# Altium PCB PCB1.PcbDoc (part 1 of 2)
Units mm, origin at the board's own origin, x right, y up, seen from the top; angles counter-clockwise.
Board outline 74.3 x 80 mm, 4 copper layers (Top Layer, GND_PLANE, PWR_PLANE, Bottom Layer), stack 0.603 mm thick; 83 components, 65 nets, 320 pads, 166 vias.
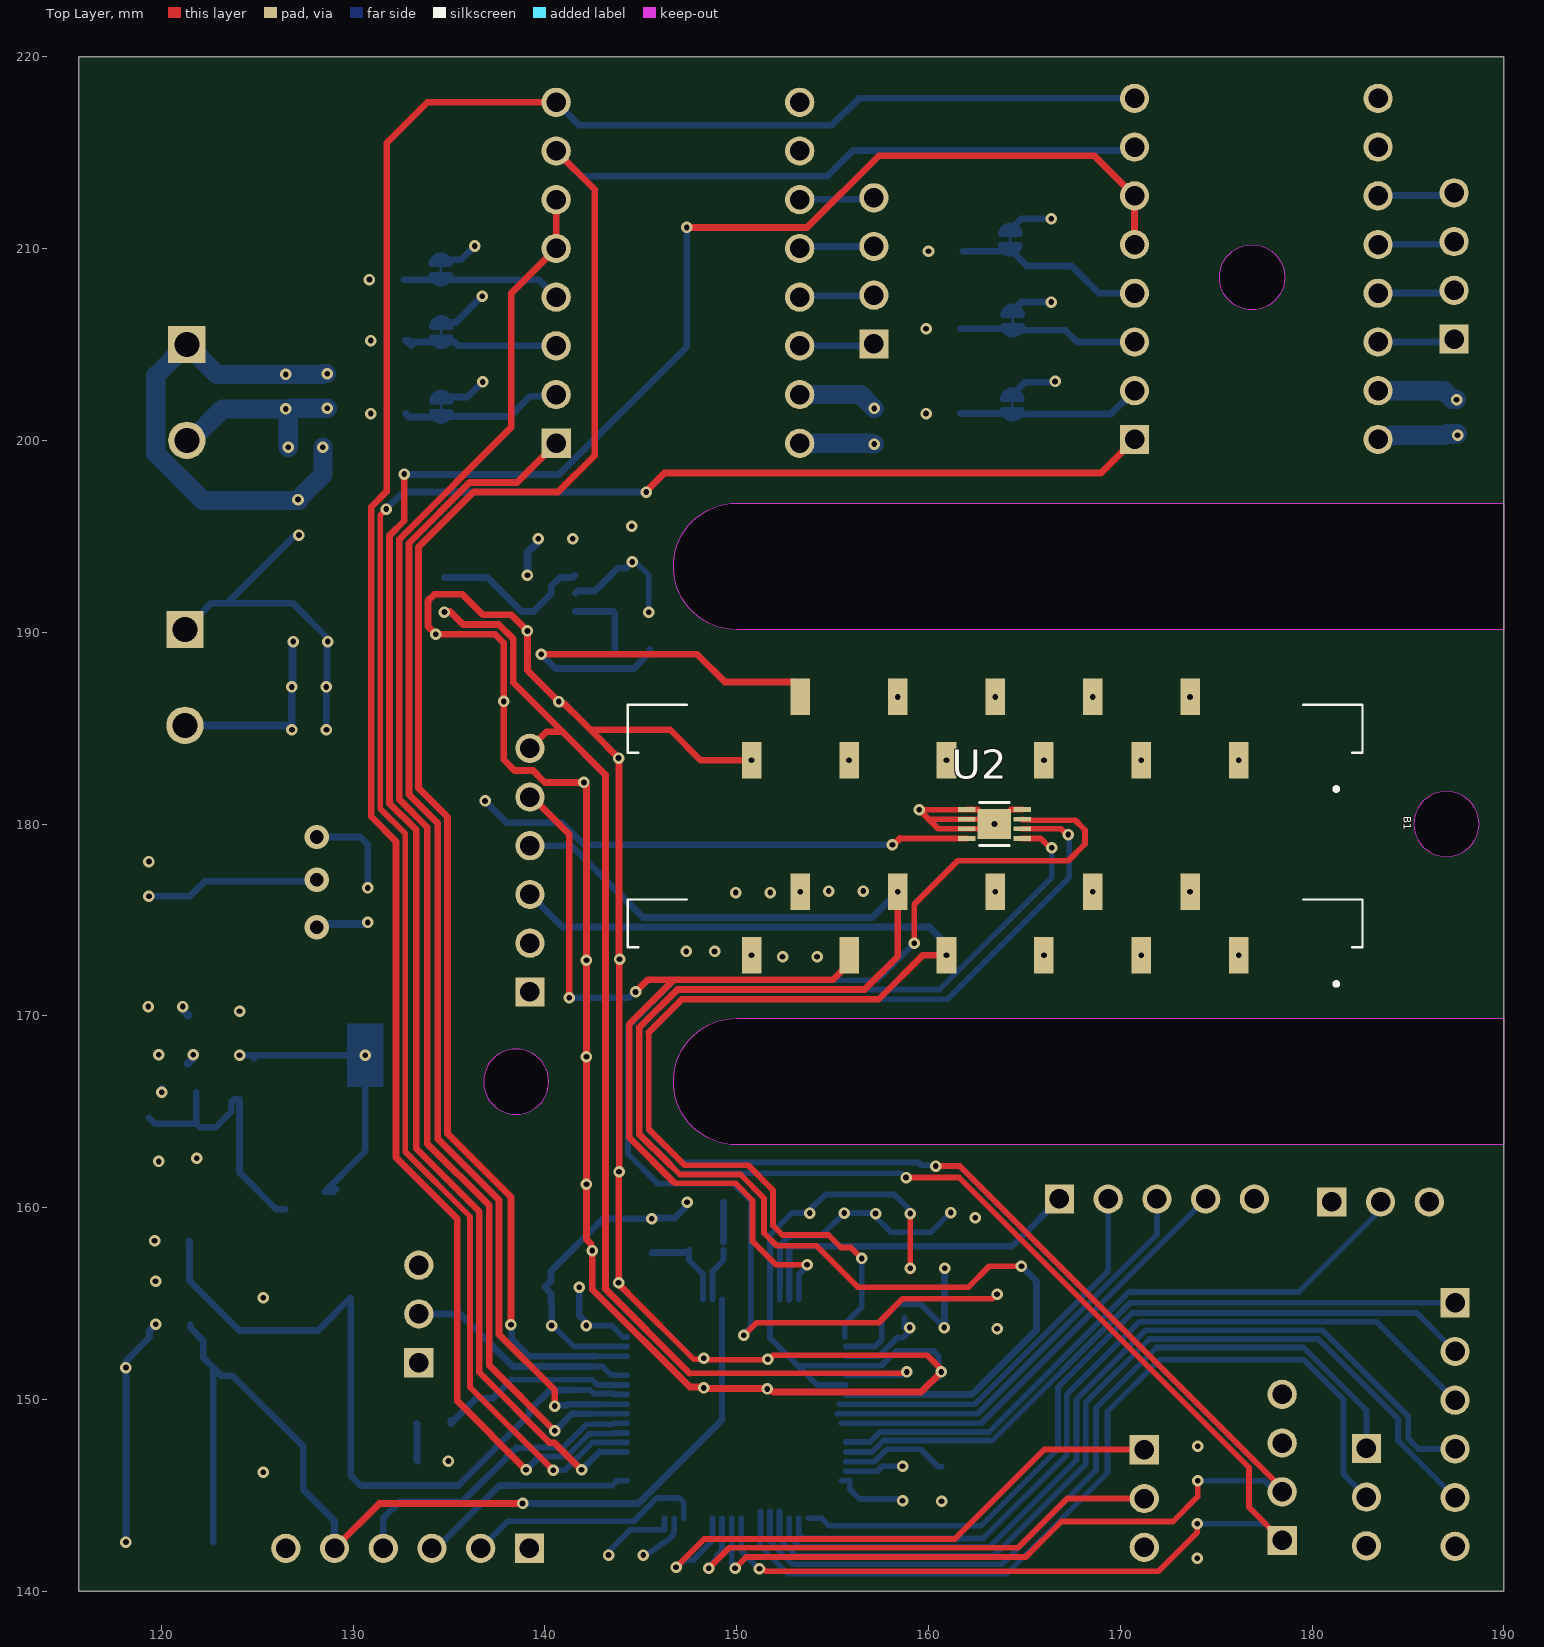
[diagram p0: Top Layer view]
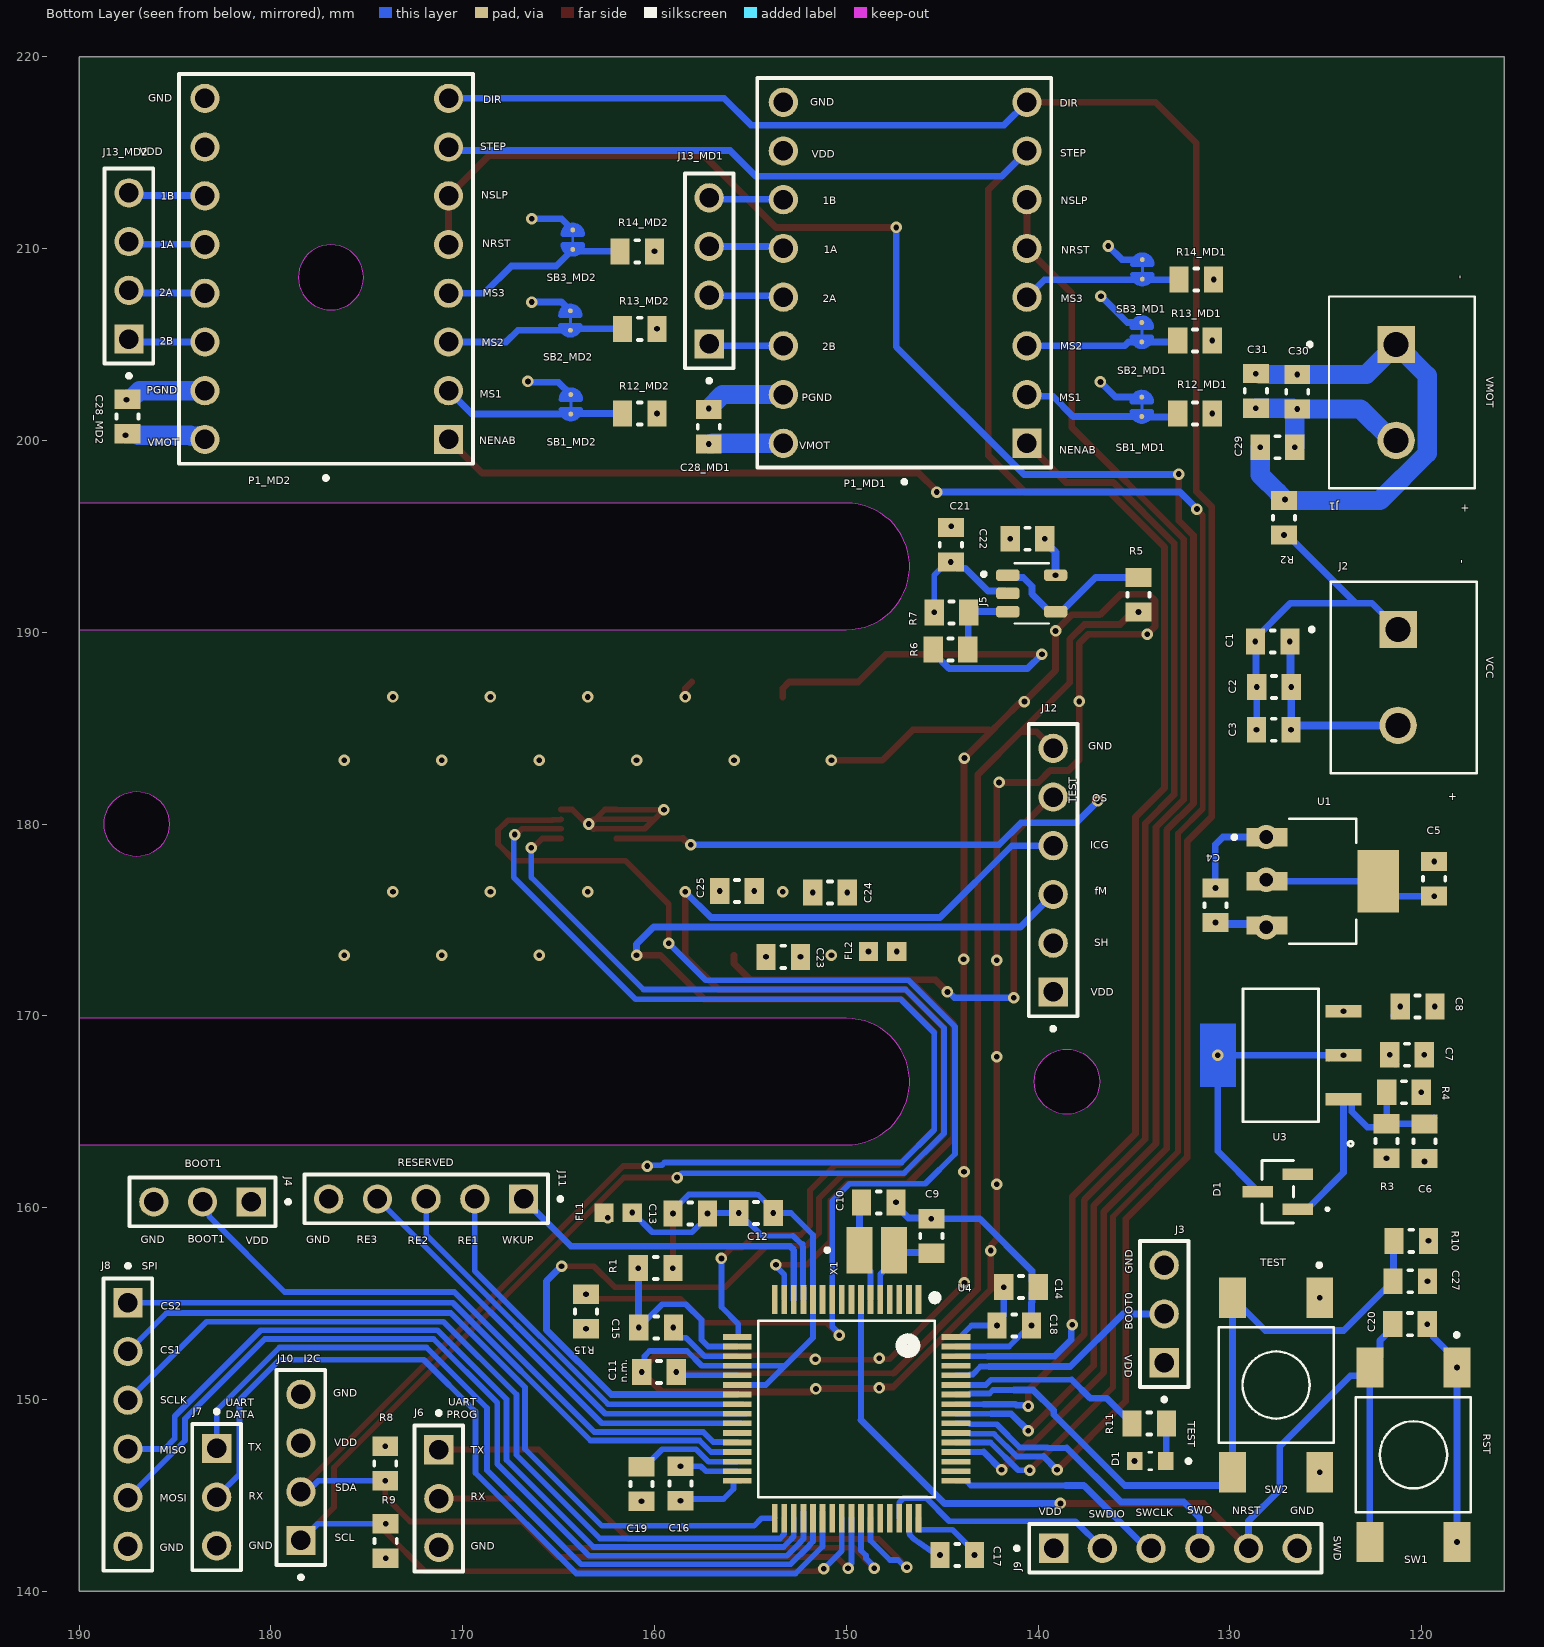
[diagram p1: Bottom Layer view, seen from below]
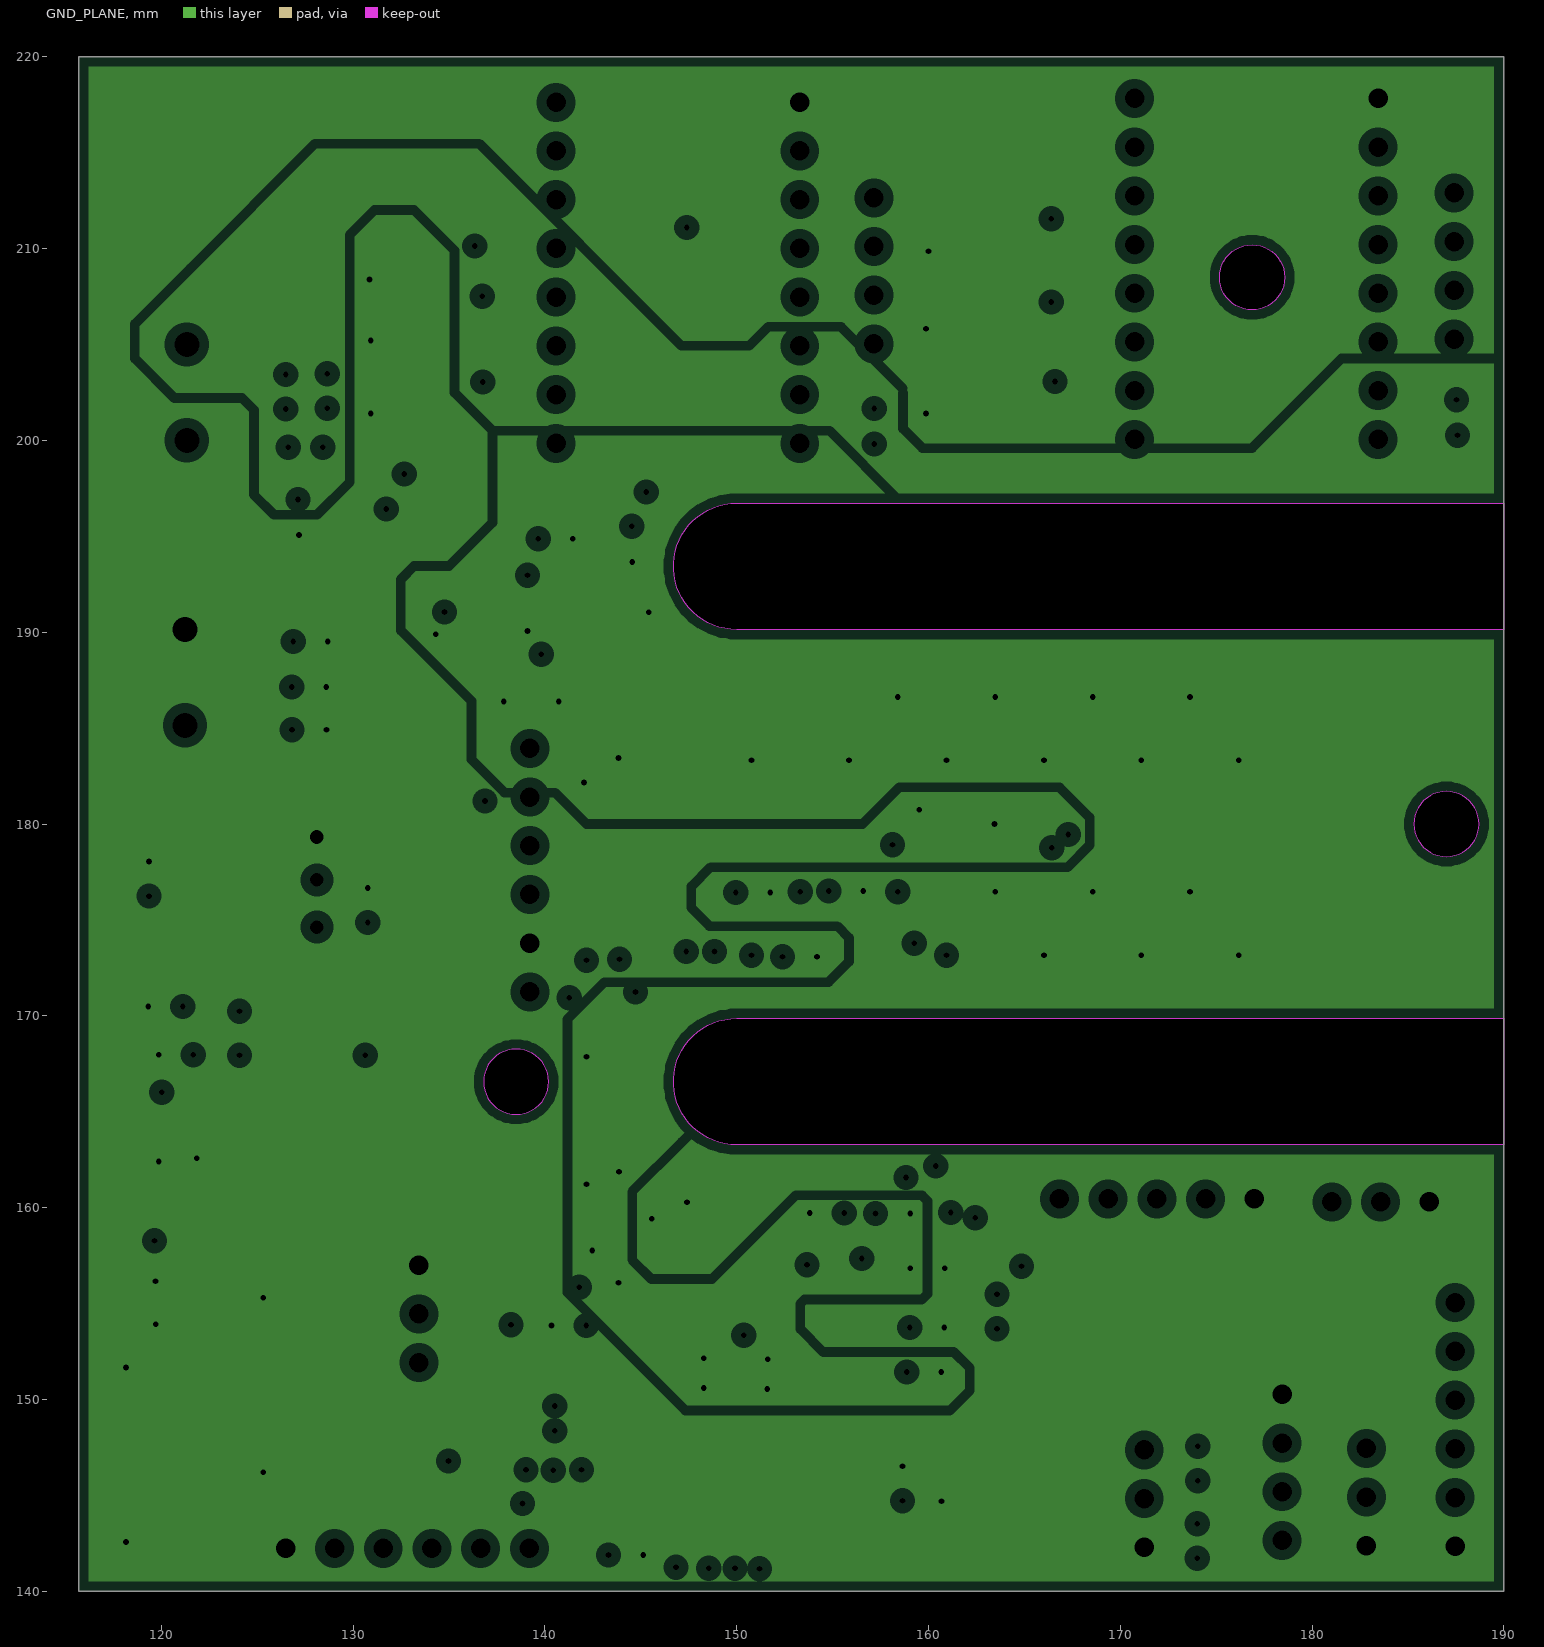
[diagram p2: GND_PLANE, clearances drawn from the general rule]
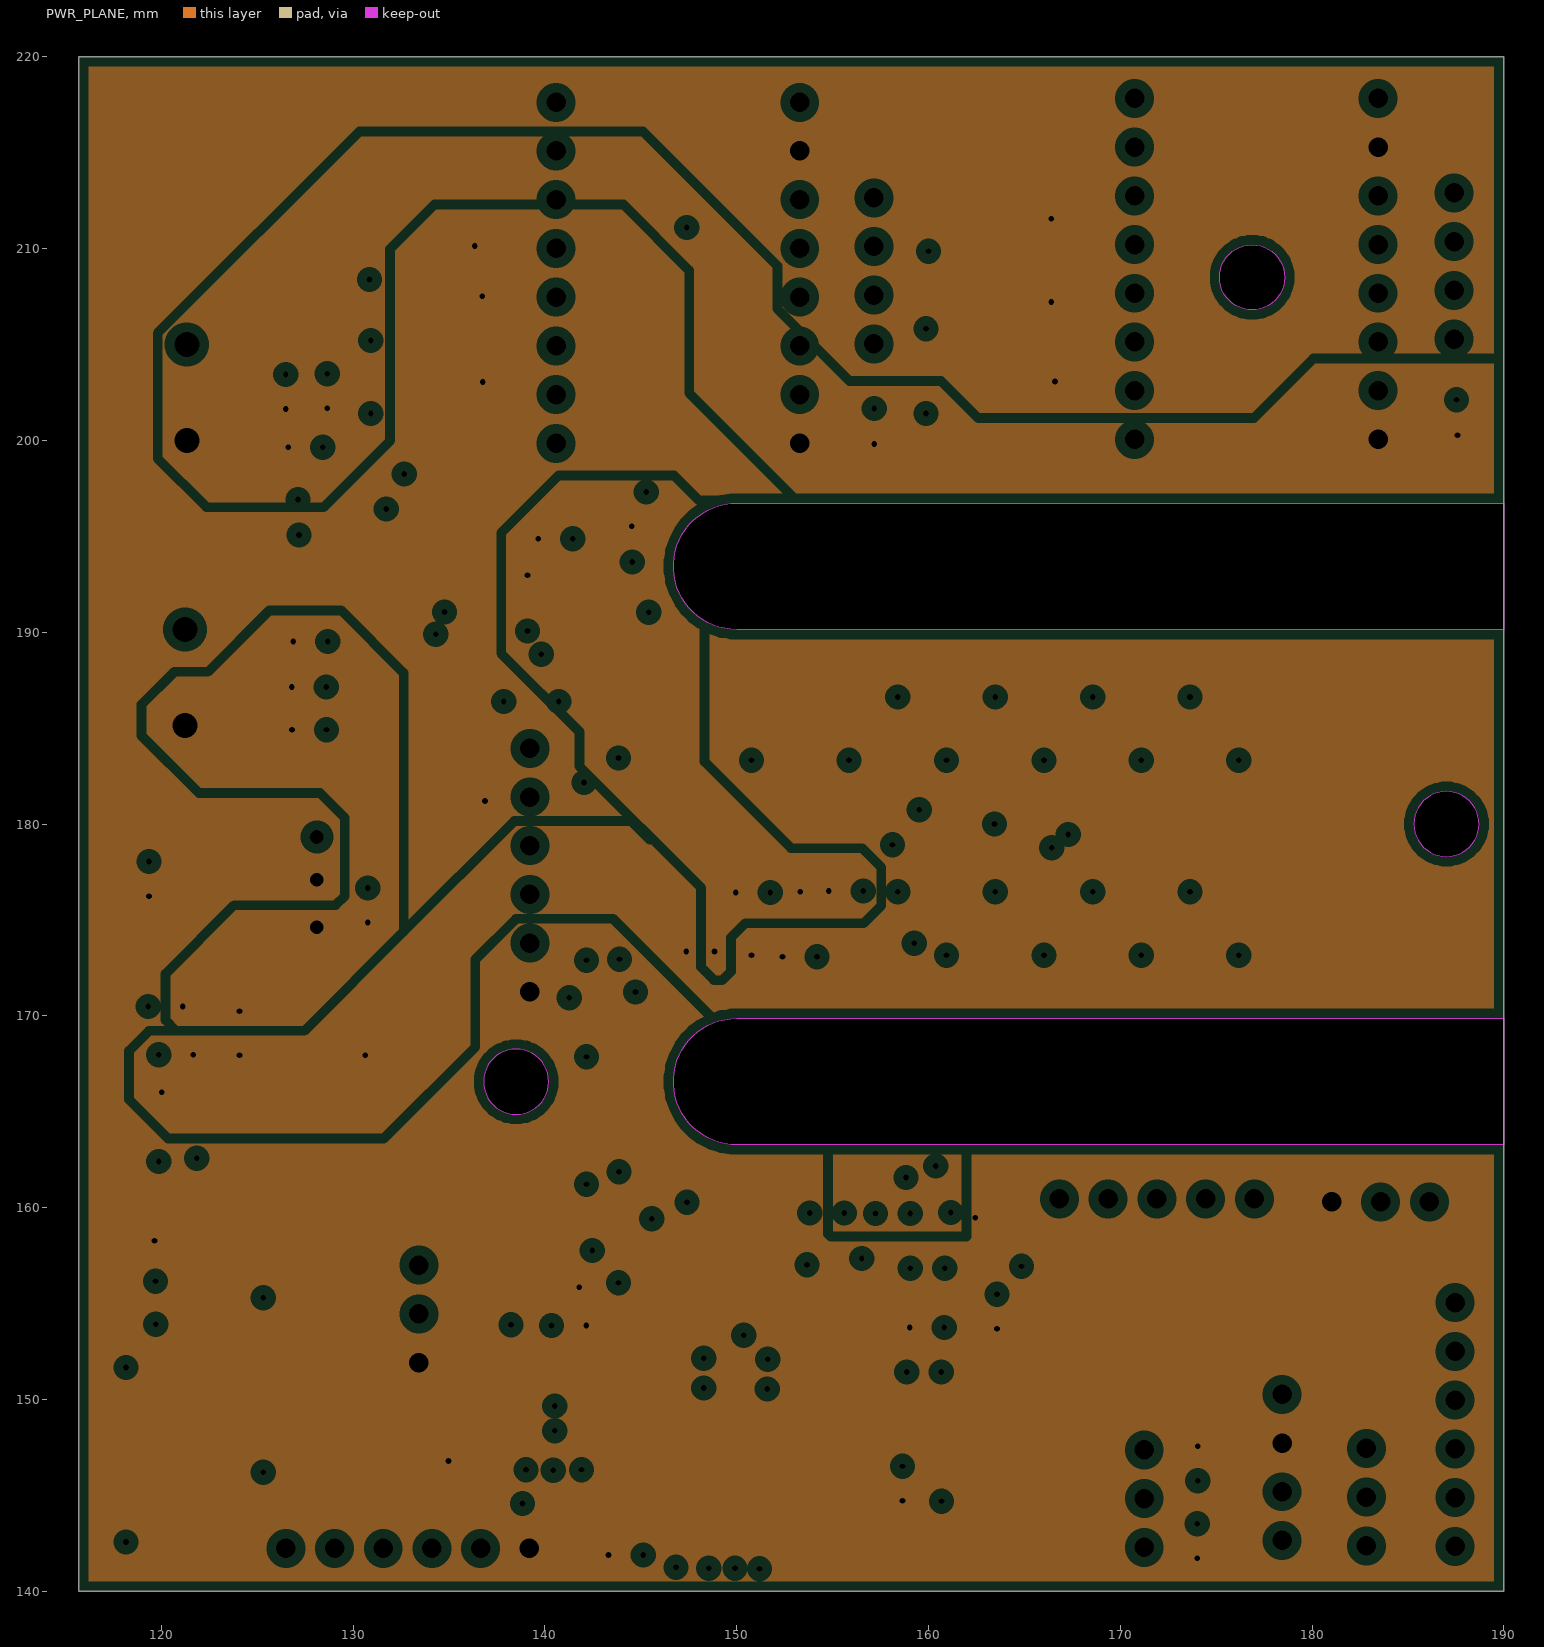
[diagram p3: PWR_PLANE, clearances drawn from the general rule]

## Layer stack, top to bottom
Top Solder: solder mask 0.0102, Solder Resist, Dk 3.5
Top Layer: signal copper 0.0356
Dielectric 2: prepreg 0.0711, PP-006, Dk 4.1
GND_PLANE: plane copper 0.035, net GND
Dielectric 1: dielectric 0.32, FR-4, Dk 4.8
PWR_PLANE: plane copper 0.035, net (Multiple Nets)
Dielectric 3: prepreg 0.0711, PP-006, Dk 4.1
Bottom Layer: signal copper 0.0356
Bottom Solder: solder mask 0.0102, Solder Resist, Dk 3.5

## Board outline
115.697,140 115.697,220 190,220 190,140
cut-out: 150,163.265 cw(c150,166.565) 150,169.865 190,169.865 190,163.265
cut-out: 150,190.135 cw(c150,193.435) 150,196.735 190,196.735 190,190.135
cut-out: 176.87,206.8 cw(c176.87,208.5) 175.17,208.5 cw(c176.87,208.5) 176.87,210.2 cw(c176.87,208.5) 178.57,208.5 cw(c176.87,208.5)
cut-out: 185.3,180 ccw(c187,180) 187,178.3 ccw(c187,180) 188.7,180 ccw(c187,180) 187,181.7 ccw(c187,180)
cut-out: 138.5,164.865 ccw(c138.5,166.565) 140.2,166.565 ccw(c138.5,166.565) 138.5,168.265 ccw(c138.5,166.565) 136.8,166.565 ccw(c138.5,166.565)

## Design rules (kind name [scope] priority, off if disabled: settings)
BoardOutlineClearance [All] p1: gap=0.5 ignorepadtopadclearanceinfootprint=FALSE
Clearance Clearance_bridges [All vs InComponent('SB4_MD1') OR InComponent('SB5_MD1') OR InComponent('SB6_MD1') OR InComponent('SB4_MD2') OR InComponent('SB5_MD2') OR InComponent('SB6_MD2')] p1: gap=0.05 ignorepadtopadclearanceinfootprint=FALSE
Clearance [All] p2: gap=0.15 ignorepadtopadclearanceinfootprint=FALSE
PlaneClearance [All] p1: clearance=0.508
PlaneConnect [All] p1: planeconnectstyle=Relief reliefexpansion=0.508 reliefentries=4 reliefconductorwidth=0.254 reliefairgap=0.254
PolygonConnect [All] p1: connectstyle=Relief reliefconductorwidth=0.254 reliefentries=4 polygonreliefangle="90 Angle" airgapwidth=0.254
RoutingVias [All] p1: holewidth=0.6 width=1 viastyle="Through Hole" minholewidth=0.3 minwidth=0.5 maxholewidth=0.3 maxwidth=0.6
ShortCircuit ShortCircuit_bridges [All vs InComponent('SB4_MD1') OR InComponent('SB5_MD1') OR InComponent('SB6_MD1') OR InComponent('SB4_MD2') OR InComponent('SB5_MD2') OR InComponent('SB6_MD2')] p1: allowed=TRUE
ShortCircuit [All] p2: allowed=FALSE
SolderMaskExpansion [All] p1: expansion=0.102 istentingtop=FALSE
SupplyNets "Schematic Supply Nets_3" [InNet('VBB')] p1: voltage=0.000
SupplyNets "Schematic Supply Nets_8" [InNet('VTCDA')] p2: voltage=0.000
SupplyNets "Schematic Supply Nets_7" [InNet('VDD')] p3: voltage=0.000
SupplyNets "Schematic Supply Nets_6" [InNet('PGND')] p4: voltage=0.000
SupplyNets "Schematic Supply Nets_5" [InNet('AGND')] p5: voltage=0.000
SupplyNets "Schematic Supply Nets_4" [InNet('GND')] p6: voltage=0.000
SupplyNets "Schematic Supply Nets_2" [InNet('VDDA')] p7: voltage=0.000
SupplyNets "Schematic Supply Nets_1" [InNet('VCC')] p8: voltage=0.000
SupplyNets "Schematic Supply Nets" [InNet('VTCD')] p9: voltage=0.000
Width Width_bridges [InComponent('SB4_MD1') OR InComponent('SB5_MD1') OR InComponent('SB6_MD1') OR InComponent('SB4_MD2') OR InComponent('SB5_MD2') OR InComponent('SB6_MD2')] p1: maxlimit=0.254 minlimit=0.15 preferedwidth=0.2
Width Width_motores [InNet('VBB')] p2: maxlimit=2 minlimit=0.5 preferedwidth=1
Width [All] p3: maxlimit=1 minlimit=0.2 preferedwidth=0.25
27 further rules are at their usual default settings.

## Classes and differential pairs
channel class MotorDriver: MD1 MD2
component class U_Sensor: B1 C21 C22 C23 C24 C25 FL2 J5 R5 R6 R7 R15 U2
component class U_Power: C1 C2 C3 C4 C5 C6 C7 C8 C29 C30 C31 D1 J1 J2 R1 R2 R3 R4 U1 U3
component class U_Out: C27 D1 J6 J7 J8 J9 J10 J11 J12 R8 R9 R10 R11 SW2
component class U_Microcontroller: C9 C10 C11 C12 C13 C14 C15 C16 C17 C18 C19 C20 FL1 J3 J4 SW1 U4 X1
component class MD2: C28_MD2 J13_MD2 P1_MD2 R12_MD2 R13_MD2 R14_MD2 SB1_MD2 SB2_MD2 SB3_MD2
component class MD1: C28_MD1 J13_MD1 P1_MD1 R12_MD1 R13_MD1 R14_MD1 SB1_MD1 SB2_MD1 SB3_MD1

## Components (designator, comment, footprint, x,y, rotation, side; value= is the part's Value field where it differs from the comment)
B1 "TCD1304DG_8Z_AW_" SOCKET-15_SMD-HARWIN_M20-7861546 163.435,180 r0 top locked
C1 "4.7uF" RES_0805 127.776,189.509 r180 bottom
C2 "100nF" RES_0805 127.7,187.147 r180 bottom
C3 "100pF" RES_0805 127.711,184.912 r180 bottom
C4 "10uF" RES_0805 130.759,175.768 r270 bottom
C5 "10uF" RES_0805 119.355,177.14 r270 bottom
C6 "22uF" RES_0805 119.863,163.46 r90 bottom
C7 "10uF" RES_0805 120.766,167.97 r0 bottom
C8 "10uF" RES_0805 120.218,170.485 r0 bottom
C9 "10pF" RES_0805 145.567,158.521 r270 bottom
C10 "10pF" RES_0805 148.311,160.274 r0 bottom
C11 "100pF not mount" RES_0805 159.766,151.435 r180 bottom
C12 "4.7uF" RES_0805 154.711,159.715 r180 bottom
C13 "100nF" RES_0805 158.14,159.69 r0 bottom
C14 "4.7uF" RES_0805 140.894,155.854 r180 bottom
C15 "100nF" RES_0805 159.918,153.746 r0 bottom
C16 "100nF" RES_0805 158.648,145.618 r90 bottom
C17 "100nF" RES_0805 144.221,141.884 r0 bottom
C18 "100nF" RES_0805 141.249,153.848 r180 bottom
C19 "4.7uF" RES_0805 160.68,145.593 r90 bottom
C20 "100nF" RES_0805 120.61,153.924 r180 bottom
C21 "10uF" RES_0805 144.551,194.564 r270 bottom
C22 "100nF" RES_0805 140.553,194.869 r0 bottom
C23 "10uF" RES_0805 153.289,173.076 r0 bottom
C24 "10uF" RES_0805 150.851,176.428 r0 bottom
C25 "100nF" RES_0805 155.702,176.505 r0 bottom
C27 "100nF" RES_0805 120.599,156.159 r180 bottom
C28_MD1 "100uF" RES_0805 157.175,200.711 r90 bottom (schematic designator C28)
C28_MD2 "100uF" RES_0805 187.477,201.244 r90 bottom (schematic designator C28)
C29 "4.7uF" RES_0805 127.522,199.644 r180 bottom
C30 "100nF" RES_0805 126.492,202.54 r270 bottom
C31 "100pF" RES_0805 128.651,202.579 r270 bottom
D1 "BAS40-7-F" SOT-23_DIO-M 127.508,160.832 r90 bottom
D1 "LED" LEDC1608X35N 134.163,146.787 r0 bottom
FL1 "BEAD" BEADC1608X95N 161.898,159.741 r180 bottom
FL2 "BEAD" BEADC1608X95N 148.107,173.355 r0 bottom
J1 "2PBORN" CUI_TB002-500-02BE 121.336,205 r270 bottom
J2 "Bornera" CUI_TB002-500-02BE 121.234,190.141 r270 bottom
J3 "PIN_HEADER_3" GEN_PIN3 133.426,154.457 r90 bottom
J4 "PIN_HEADER_3" GEN_PIN3 183.566,160.299 r0 bottom
J5 "OPAMP" SOT95P280X145-5N 140.335,192.024 r180 bottom
J6 "PIN_HEADER_3" GEN_PIN3 171.247,144.831 r270 bottom
J7 "PIN_HEADER_3" GEN_PIN3 182.829,144.907 r270 bottom
J8 "PIN_HEADER_6" GEN_PIN6 187.452,148.692 r270 bottom
J9 "PIN_HEADER_6" GEN_PIN6 132.842,142.24 r180 bottom
J10 "PIN_HEADER_4" GEN_PIN4 178.435,146.456 r90 bottom
J11 "PIN_HEADER_5" GEN_PIN5 171.907,160.452 r0 bottom
J12 "PIN_HEADER_6" GEN_PIN6 139.217,177.597 r90 bottom
J13_MD1 "PIN_HEADER_4" GEN_PIN4 157.15,208.839 r90 bottom (schematic designator J13)
J13_MD2 "PIN_HEADER_4" GEN_PIN4 187.401,209.093 r90 bottom (schematic designator J13)
P1_MD1 "2x8_PINES" PINES8x2-sep 147.015,208.382 r90 bottom (schematic designator P1)
P1_MD2 "2x8_PINES" PINES8x2-sep 177.169,208.584 r90 bottom (schematic designator P1)
R1 "0" RES_0805 159.944,156.845 r0 bottom
R2 "0" RES_0805 127.178,195.961 r270 bottom
R3 "220" RES_0805 121.844,163.474 r90 bottom
R4 "100" RES_0805 120.929,166.014 r0 bottom
R5 "100" RES_0805 134.763,191.947 r90 bottom
R6 "1k" RES_0805 144.566,189.103 r180 bottom
R7 "10k" RES_0805 144.515,191.033 r0 bottom
R8 "10k" RES_0805 174.041,146.66 r90 bottom
R9 "10k" RES_0805 174.015,142.621 r270 bottom
R10 "10k" RES_0805 120.548,158.267 r180 bottom
R11 "330" RES_0805 134.203,148.742 r180 bottom
R12_MD1 "10k" RES_0805 131.826,201.397 r0 bottom (schematic designator R12)
R12_MD2 "10k" RES_0805 160.771,201.397 r0 bottom (schematic designator R12)
R13_MD1 "10k" RES_0805 131.826,205.207 r0 bottom (schematic designator R13)
R13_MD2 "10k" RES_0805 160.771,205.816 r0 bottom (schematic designator R13)
R14_MD1 "10k" RES_0805 131.75,208.382 r0 bottom (schematic designator R14)
R14_MD2 "10k" RES_0805 160.898,209.855 r0 bottom (schematic designator R14)
R15 "10k" RES_0805 163.576,154.584 r270 bottom
SB1_MD1 "SolderBridge_Short" SolderBridge_Short#1 134.595,201.752 r90 bottom (schematic designator SB1)
SB1_MD2 "SolderBridge_Short" SolderBridge_Short#2 164.363,201.879 r90 bottom (schematic designator SB1)
SB2_MD1 "SolderBridge_Short" SolderBridge_Short#3 134.595,205.638 r90 bottom (schematic designator SB2)
SB2_MD2 "SolderBridge_Short" SolderBridge_Short#2 164.389,206.248 r90 bottom (schematic designator SB2)
SB3_MD1 "SolderBridge_Short" SolderBridge_Short#4 134.569,208.915 r90 bottom (schematic designator SB3)
SB3_MD2 "SolderBridge_Short" SolderBridge_Short#2 164.262,210.464 r90 bottom (schematic designator SB3)
SW1 "BOTON" SW_4-1437565-2 120.432,147.113 r270 bottom
SW2 "BOTON" SW_4-1437565-2 127.595,150.752 r270 bottom
U1 "NCV1117ST33T3G" SOT230P700X180-4N 125.171,177.013 r180 bottom
U2 "MCP9808T-E/MC" DFN8_2x3MC_MCH-M 163.435,180 r180 top
U3 "NCV1117STAT3G" SOT223-3_ONS-M 127.356,167.945 r90 bottom
U4 "STM32F446RCT6TR" QFP50P1200X1200X160-64N 149.987,149.504 r270 bottom
X1 "CRISTAL-8M" XTALDFN320X250X100-2N 148.412,157.785 r180 bottom

## Footprints (in the part's own frame and the unit in brackets; to place one, negate y for a bottom-side part, rotate by r counter-clockwise, add the part's x,y. Pads: shape width x height; smd on the part's side, far side on the other; paste and mask are expansions set on the pad)
BEADC1608X95N [mm]
  rect 1x0.97 smd: 1(-0.735,0) 2(0.735,0)
  body extent -0.8,-0.4 0.8,0.4, height 0.95
CUI_TB002-500-02BE [mm]
  rect 1.95x1.95 / inner round 1.95 / far side rect 1.95x1.95 hole 1.3: 1(0,0)
  round 1.95 hole 1.3: 2(5,0)
  silkscreen extent -2.5,-4.6 7.5,4.1, body extent -2.52,-4.08 7.98,3.52, height 10
DFN8_2x3MC_MCH-M [mm]
  rect 0.908x0.255 smd paste+0 mask+0: 1(-1.445,0.75) 2(-1.445,0.25) 3(-1.445,-0.25) 4(-1.445,-0.75) 5(1.445,-0.75) 6(1.445,-0.25) 7(1.445,0.25) 8(1.445,0.75)
  rect 1.753x1.549 smd paste+0 mask+0: 9(0,0)
  silkscreen extent -0.77,-1.13 0.77,1.13, body extent -1.5,-1 1.5,1, height 0.94
GEN_PIN3 [mil] "Generic 40 mils drill size, 100 mils step"
  rect 60x60 / inner round 60 / far side rect 60x60 hole 40: 01(-100,0)
  round 60 hole 40: 02(0,0) 03(100,0)
  silkscreen extent -180,-50 150,50, body extent -150,-50 150,50, height 337
GEN_PIN4 [mil] "Generic 40 mils drill size, 100 mils step"
  rect 60x60 hole 40: 01(-150,0)
  round 60 hole 40: 02(-50,0) 03(50,0) 04(150,0)
  silkscreen extent -230,-50 200,50, body extent -200,-50 200,50, height 337
GEN_PIN5 [mil] "Generic 40 mils drill size, 100 mils step"
  rect 60x60 hole 40: 01(-200,0)
  round 60 hole 40: 02(-100,0) 03(0,0) 04(100,0) 05(200,0)
  silkscreen extent -280,-50 250,50, body extent -250,-50 250,50, height 337
GEN_PIN6 [mil] "Generic 40 mils drill size, 100 mils step"
  rect 60x60 / inner round 60 / far side rect 60x60 hole 40: 01(-250,0)
  round 60 hole 40: 02(-150,0) 03(-50,0) 04(50,0) 05(150,0) 06(250,0)
  silkscreen extent -330,-50 300,50, body extent -300,-50 300,50, height 337
LEDC1608X35N [mm]
  rect 0.81x0.93 smd: A(0.81,0) C(-0.81,0)
  silkscreen extent -2.1,-0.45 0.09,0.45, body extent -0.8,-0.4 0.8,0.4, height 0.8
PINES8x2-sep [mil]
  rect 60x60 / inner round 60 / far side rect 60x60 hole 40: 1(-335.98,-253.15)
  round 60 hole 40: 2(-235.98,-253.15) 3(-135.98,-253.15) 4(-35.98,-253.15) 5(64.02,-253.15) 6(164.02,-253.15) 7(264.02,-253.15) 8(364.02,-253.15) 9(364.02,246.85) 10(264.02,246.85) 11(164.02,246.85) 12(64.02,246.85) 13(-35.98,246.85) 14(-135.98,246.85) 15(-235.98,246.85) 16(-335.98,246.85)
  silkscreen extent -419,-303 414,300, body extent -400,-301 426,300, height 571
QFP50P1200X1200X160-64N [mm]
  rect 1.5x0.3 smd: 1(-5.7,3.75) 2(-5.7,3.25) 3(-5.7,2.75) 4(-5.7,2.25) 5(-5.7,1.75) 6(-5.7,1.25) 7(-5.7,0.75) 8(-5.7,0.25) 9(-5.7,-0.25) 10(-5.7,-0.75) 11(-5.7,-1.25) 12(-5.7,-1.75) 13(-5.7,-2.25) 14(-5.7,-2.75) 15(-5.7,-3.25) 16(-5.7,-3.75) 33(5.7,-3.75) 34(5.7,-3.25) 35(5.7,-2.75) 36(5.7,-2.25) 37(5.7,-1.75) 38(5.7,-1.25) 39(5.7,-0.75) 40(5.7,-0.25) 41(5.7,0.25) 42(5.7,0.75) 43(5.7,1.25) 44(5.7,1.75) 45(5.7,2.25) 46(5.7,2.75) 47(5.7,3.25) 48(5.7,3.75)
  rect 0.3x1.5 smd: 17(-3.75,-5.7) 18(-3.25,-5.7) 19(-2.75,-5.7) 20(-2.25,-5.7) 21(-1.75,-5.7) 22(-1.25,-5.7) 23(-0.75,-5.7) 24(-0.25,-5.7) 25(0.25,-5.7) 26(0.75,-5.7) 27(1.25,-5.7) 28(1.75,-5.7) 29(2.25,-5.7) 30(2.75,-5.7) 31(3.25,-5.7) 32(3.75,-5.7) 49(3.75,5.7) 50(3.25,5.7) 51(2.75,5.7) 52(2.25,5.7) 53(1.75,5.7) 54(1.25,5.7) 55(0.75,5.7) 56(0.25,5.7) 57(-0.25,5.7) 58(-0.75,5.7) 59(-1.25,5.7) 60(-1.75,5.7) 61(-2.25,5.7) 62(-2.75,5.7) 63(-3.25,5.7) 64(-3.75,5.7)
  silkscreen extent -6.08,-4.6 4.6,4.88, body extent -6,-6 6,6, height 1.6
RES_0805 [mm] "Chip Resistor, 2-Leads, Body 2.00x1.25mm, IPC Medium Density"
  rect 1x1.35 smd: 1(-0.9,0) 2(0.9,0)
  silkscreen extent -0.1,-0.58 0.1,0.58, body extent -1.05,-0.67 1.05,0.67, height 0.6
SOCKET-15_SMD-HARWIN_M20-7861546 [mm]
  rect 1.02x1.9 smd: 1(-12.659,-6.837) 2(-10.119,-3.537) 3(-7.579,-6.837) 4(-5.039,-3.537) 5(-2.499,-6.837) 6(0.041,-3.537) 7(2.581,-6.837) 8(5.121,-3.537) 9(7.661,-6.837) 10(10.201,-3.537) 11(12.741,-6.837) 12(12.741,3.323) 13(10.201,6.623) 14(7.661,3.323) 15(5.121,6.623) 16(2.581,3.323) 17(0.041,6.623) 18(-2.499,3.323) 19(-5.039,6.623) 20(-7.579,3.323) 21(-10.119,6.623) 22(-12.659,3.323)
  silkscreen extent -19.11,-8.44 19.19,6.22, body extent -20.8,-7.08 20.8,7.08, height 11.34
SolderBridge_Short#1 [mil]
  round 10 smd mask+0: 1(-20,0) 2(20,0)
  Top Layer region: 10,20 21.96,18.4 29.53,10.83 29.53,-9.84 19.37,-20 10,-20
  Top Layer region: -9.02,-19.51 -20.97,-17.9 -28.54,-10.33 -28.54,10.33 -18.39,20.49 -9.02,20.49
  Top Layer lines w6: -10,0 10,0
  Top Layer lines w10: -10,-20 cw(c-10,0) -10,20 -10,0 -10,-20 ; 10,-20 ccw(c10,0) 20,17.32 ccw(c10,0) 15,19.36 ccw(c10,0) 10,20 10,0 10,-20
SolderBridge_Short#2 [mil]
  round 10 smd mask+0: 1(-20,0) 2(20,0)
  Top Layer region: 10,20 21.96,18.4 29.53,10.83 29.53,-9.84 19.37,-20 10,-20
  Top Layer region: -9.02,-19.51 -20.97,-17.9 -28.54,-10.33 -28.54,10.33 -18.39,20.49 -9.02,20.49
  Top Layer lines w6: -10,0 10,0
  Top Layer lines w10: -10,-20 cw(c-10,0) -24,-14.28 cw(c-10,0) -28.23,8.23 cw(c-10,0) -10,20 -10,0 -10,-20 ; 10,-20 ccw(c10,0) 10,20 10,0 10,-20
SolderBridge_Short#3 [mil]
  round 10 smd mask+0: 1(-20,0) 2(20,0)
  Top Layer region: 10,20 21.96,18.4 29.53,10.83 29.53,-9.84 19.37,-20 10,-20
  Top Layer region: -9.02,-19.51 -20.97,-17.9 -28.54,-10.33 -28.54,10.33 -18.39,20.49 -9.02,20.49
  Top Layer lines w6: -10,0 10,0
  Top Layer lines w10: -10,-20 cw(c-10,0) -10,20 -10,0 -10,-20 ; 10,-20 ccw(c10,0) 20,17.32 ccw(c10,0) 10,20 10,0 10,-20
SolderBridge_Short#4 [mil]
  round 10 smd mask+0: 1(-20,0) 2(20,0)
  Top Layer region: 10,20 21.96,18.4 29.53,10.83 29.53,-9.84 19.37,-20 10,-20
  Top Layer region: -9.02,-19.51 -20.97,-17.9 -28.54,-10.33 -28.54,10.33 -18.39,20.49 -9.02,20.49
  Top Layer lines w6: -10,0 10,0
  Top Layer lines w10: -10,-20 cw(c-10,0) -10,20 -10,-20 ; 10,-20 ccw(c10,0) 10,20 10,-20
SOT95P280X145-5N [mm]
  rrect50% 1.22x0.6 smd: 1(-1.245,0.95) 2(-1.245,0) 3(-1.245,-0.95) 4(1.245,-0.95) 5(1.245,0.95)
  silkscreen extent -2.6,-1.57 0.88,1.57, body extent -1.35,-1.45 1.35,1.45, height 1.45
SOT223-3_ONS-M [mil]
  rect 26x73 smd paste+0 mask+0: 1(-90.5,-129) 2(0,-129) 3(90.5,-129)
  round 1 smd: 4(0,129)
  Top Layer region: 65,92.5 65,165.5 -65,165.5 -65,92.5
  silkscreen extent -186,-148 136,78, body extent -131,-144 131,144, height 68
SOT230P700X180-4N [mm]
  rect 2.15x0.95 smd paste+0 mask+0.102: 1(-2.9,2.3) 2(-2.9,0) 3(-2.9,-2.3)
  rect 2.15x3.25 smd paste+0 mask+0.102: 4(2.9,0)
  silkscreen extent -4.7,-3.25 1.75,3.25, body extent -3.5,-3.25 3.5,3.25, height 1.8
SOT-23_DIO-M [mil]
  rect 24x62 smd paste+0 mask+0: 1(-36.02,-41) 2(36.02,-41) 3(0,41)
  silkscreen extent -64,-105 64,33, body extent -59,-50 59,50, height 45
SW_4-1437565-2 [mm]
  rect 2.1x1.4 smd: 1(-4.55,2.275) 2(4.55,2.275) 3(-4.55,-2.275) 4(4.55,-2.275)
  silkscreen extent -6.35,-3 3,3, body extent -5,-3 5,3, height 5.38
XTALDFN320X250X100-2N [mm]
  rect 1.37x2.43 smd: 1(-0.9,0) 2(0.9,0)
  silkscreen extent -2.69,-0.1 -2.49,0.1, body extent -1.6,-1.25 1.6,1.25, height 1

## Part data
B1: "Image Sensors & Color Sensors CCD Linear Sensor 3648 8x20 54mm", Manufacturer_Name=Toshiba, Manufacturer_Part_Number=TCD1304DG(8Z,AW), Mouser Part Number=757-TCD1304DG8ZAW, Datasheet Link=https://datasheet.datasheetarchive.com/originals/distributors/DKDS-29/569259.pdf, Geometry.Height=3.72mm, Mouser Price/Stock=https://www.mouser.co.uk/ProductDetail/Toshiba/TCD1304DG8ZAW?qs=OLJpxlzHOSRVMcyirxbASw%3D%3D
C1 C2 C3 C4 C5 C6 C7 C8 C9 C10 C11 C12 C13 C14 C15 C16 C17 C18 C19 C20 C21 C22 C23 C24 C25 C27 C28_MD1 C28_MD2 C29 C30 C31: library part CAP_0805, "Generic Capacitor"
D1: library part DIODE-BAS40-7-F, "Description", Manufacturer_Name="Diodes Inc", Copyright="Copyright (C) 2025 Ultra Librarian. All rights reserved.", Manufacturer_Part_Number=BAS40-7-F, RefDes=RefDes, Type="Diodes - Rectifiers, Single"
D1: library part LED-LTST-C190KRKT, "Red 631nm LED Indication - Discrete 2V 0603 (1608 Metric)", Package="0603 Lite-On", Availability="In Stock", Check_prices=https://www.snapeda.com/parts/LTST-C190KRKT/Lite-On+Inc./view-part/?ref=eda, MF="Lite-On Inc.", MP=LTST-C190KRKT, Price=None, Purchase-URL=https://pricing.snapeda.com/search/part/LTST-C190KRKT/?ref=eda, SnapEDA_Link=https://www.snapeda.com/parts/LTST-C190KRKT/Lite-On+Inc./view-part/?ref=snap
FL1 FL2: library part FERRITE-BLM18AG601SN1D, "600 Ohms @ 100 MHz 1 - Ferrite Bead 0603 (1608 Metric) 500mA 380mOhm", Package="1608 Murata", Availability="In Stock", Check_prices=https://www.snapeda.com/parts/BLM18AG601SN1D/Murata/view-part/?ref=eda, MF=Murata, MP=BLM18AG601SN1D, Price=None, Purchase-URL=https://pricing.snapeda.com/search/part/BLM18AG601SN1D/?ref=eda, SnapEDA_Link=https://www.snapeda.com/parts/BLM18AG601SN1D/Murata/view-part/?ref=snap
J1 J2: library part 2PBorn-TB002-500-02BE, "2~24 Poles, Screw Type, Horizontal, 5.0 Pitch, 22~12 (AWG), Terminal Block Connector", Package=None, Check_prices=https://www.snapeda.com/parts/TB002-500-02BE/Same+Sky/view-part/?ref=eda, MF="Same Sky", MP=TB002-500-02BE, SnapEDA_Link=https://www.snapeda.com/parts/TB002-500-02BE/Same+Sky/view-part/?ref=snap
J3 J4 J6 J7 J8 J9 J10 J11 J12 J13_MD1 J13_MD2: "Generic 40 mils drill size, 100 mils step", Package=None, MF="Samtec Inc."
  J3 J4 J6 J7: Check_prices=https://www.snapeda.com/parts/TS-103-T-A/Samtec+Inc./view-part/?ref=eda, MP=TS-103-T-A, SnapEDA_Link=https://www.snapeda.com/parts/TS-103-T-A/Samtec+Inc./view-part/?ref=snap
  J8 J9 J12: Check_prices=https://www.snapeda.com/parts/TS-106-T-A/Samtec+Inc./view-part/?ref=eda, MP=TS-106-T-A, SnapEDA_Link=https://www.snapeda.com/parts/TS-106-T-A/Samtec+Inc./view-part/?ref=snap
  J10 J13_MD1 J13_MD2: Availability="In Stock", Check_prices=https://www.snapeda.com/parts/TS-104-T-A/Samtec+Inc./view-part/?ref=eda, MP=TS-104-T-A, Price=None, Purchase-URL=https://pricing.snapeda.com/search/part/TS-104-T-A/?ref=eda, SnapEDA_Link=https://www.snapeda.com/parts/TS-104-T-A/Samtec+Inc./view-part/?ref=snap
  J11: Availability="In Stock", Check_prices=https://www.snapeda.com/parts/TS-105-T-A/Samtec+Inc./view-part/?ref=eda, MP=TS-105-T-A, Price=None, Purchase-URL=https://pricing.snapeda.com/search/part/TS-105-T-A/?ref=eda, SnapEDA_Link=https://www.snapeda.com/parts/TS-105-T-A/Samtec+Inc./view-part/?ref=snap
J5: library part OPAMP-MCP6001UT-E/OT, "Microchip MCP6001UT-E/OT Op Amp, 1MHz Rail-Rail, 1.8 - 6 V, 5-Pin SOT-23", Package="SOT-23 Microchip", Check_prices=https://www.snapeda.com/parts/MCP6001UT-E/OT/Microchip/view-part/?ref=eda, MF=Microchip, MP=MCP6001UT-E/OT, SnapEDA_Link=https://www.snapeda.com/parts/MCP6001UT-E/OT/Microchip/view-part/?ref=snap
R1 R2 R3 R4 R5 R6 R7 R8 R9 R10 R11 R12_MD1 R12_MD2 R13_MD1 R13_MD2 R14_MD1 R14_MD2 R15: library part RES_0805, "Generic Capacitor"
SW1 SW2: library part SW-4-1437565-2, "Switch Tactile OFF (ON) SPST Round Button Gull Wing 0.05A 24VDC 1VA 9.18N SMD T/R", Package=None, Check_prices=https://www.snapeda.com/parts/FSM4JSMATR/TE+Connectivity+ALCOSWITCH+Switches/view-part/?ref=eda, MF="TE Connectivity", MP=FSM4JSMATR, SnapEDA_Link=https://www.snapeda.com/parts/FSM4JSMATR/TE+Connectivity+ALCOSWITCH+Switches/view-part/?ref=snap
U1: library part REG3_3-NCV1117ST33T3G, "Linear Voltage Regulator IC Positive Fixed 1 Output 1A SOT-223", Package="SOT-223-4 ON Semiconductor", Check_prices=https://www.snapeda.com/parts/NCV1117ST33T3G/Onsemi/view-part/?ref=eda, MF="ON Semiconductor", MP=NCV1117ST33T3G, SnapEDA_Link=https://www.snapeda.com/parts/NCV1117ST33T3G/Onsemi/view-part/?ref=snap
U2: library part MCP9808T-EMC, "Description", Manufacturer_Name=Microchip, Copyright="Copyright (C) 2026 Ultra Librarian. All rights reserved.", Manufacturer_Part_Number=MCP9808T-E/MC, RefDes=RefDes, Type=Type
U3: "Description", Manufacturer_Name=onsemi, Copyright="Copyright (C) 2025 Ultra Librarian. All rights reserved.", Manufacturer_Part_Number=NCV1117STAT3G, RefDes=RefDes, Type=Type
U4: "ARM® Cortex®-M4 STM32F4 Microcontroller IC 32-Bit Single-Core 180MHz 256KB (256K x 8) FLASH 64-LQFP (10x10)", Package="LQFP-64 STMicroelectronics", Check_prices=https://www.snapeda.com/parts/STM32F446RCT6TR/STMicroelectronics/view-part/?ref=eda, MF=STMicroelectronics, MP=STM32F446RCT6TR, SnapEDA_Link=https://www.snapeda.com/parts/STM32F446RCT6TR/STMicroelectronics/view-part/?ref=snap
X1: library part CRISTAL-CG04874-8M, "8 MHz ±20ppm Crystal 8pF 500 Ohms 2-SMD, No Lead", Package="SMD-2 NDK America,", Check_prices=https://www.snapeda.com/parts/CG04874-8M/NDK+America%252C+Inc./view-part/?ref=eda, MF="NDK America, Inc.", MP=CG04874-8M, SnapEDA_Link=https://www.snapeda.com/parts/CG04874-8M/NDK+America%252C+Inc./view-part/?ref=snap

## Via types
v1: diameter 0.6, hole 0.3, Top Layer to Bottom Layer, 163 vias
v2: diameter 1.27, hole 0.711, Top Layer to Bottom Layer, 3 vias

## Nets (pads, with @x,y where several pads share a name; then routed paths per layer and width w, separated by ;. In a path a pad name is that pad's centre, name@x,y a point inside that pad or via, vN(x,y) a via of type N, cw(c..) or ccw(c..) an arc to the next point about the centre after c; other vN are vias at no path point)
AGND: B1.6 B1.7 B1.8 B1.9 B1.10 B1.11 B1.12 B1.13 B1.14 B1.15 B1.16 B1.17 B1.18 B1.19 B1.20 B1.22 C11.1 C12.2 C13.2 C21.2 C22.2 C24.2 C25.2 J5.2 R1.1 R7.2 U4.12 U4.20 U4.22 | length 172.9
  Top Layer w0.3: 144.348,155.507 147.767,152.089 148.016,152.089 148.266,152.089 148.285,152.07 v1@151.613,152.07 ; v1(151.613,152.095) 151.694,152.095 151.907,152.309 159.934,152.309 v1@160.716,151.526 ; v1(159.04,159.69) 159.042,159.688 159.042,156.847 v1(159.044,156.845) v1@159.044,156.667 ; v1(160.666,151.435) v1@160.666,151.516
  Top Layer w0.35: v1@143.866,161.807 143.853,161.794 143.853,156.096 v1(143.84,156.083) 143.84,156.015 144.348,155.507 ; v1@143.878,161.819 143.878,172.936 v1(143.891,172.949) 143.866,172.974 143.866,183.413 v1(143.84,183.439) 142.57,184.709 ; v1(150.776,183.323) 148.121,183.323 146.533,184.912 142.57,184.912 142.57,184.709 ; B1.19@158.061,187.398 158.396,187.063 v1(158.396,186.623) ; v1(160.666,151.435) 159.615,150.384 151.917,150.384 151.88,150.421 151.78,150.421 151.629,150.571 148.336,150.571 148.263,150.644 147.556,150.644 142.469,155.731 v1(142.469,157.759) 142.421,157.807 142.421,158.078 142.164,158.335 v1(142.164,161.214) v1(142.164,167.869) v1(142.164,172.898) 142.164,181.974 142.037,182.101 v1(142.037,182.169) 139.993,182.169 139.376,182.786 138.423,182.786 137.854,183.355 v1(137.854,186.392) 137.854,189.429 137.385,189.898 v1(134.307,189.898) 133.909,190.297 133.909,191.643 134.239,191.973 135.712,191.973 136.781,190.904 138.255,190.904 v1(139.09,190.068) 139.09,188.011 v1(140.716,186.385) 140.764,186.337 140.831,186.337 140.909,186.26 141.019,186.26 141.846,185.433 142.57,184.709
  Bottom Layer w0.3: v1(144.551,193.664) 144.726,193.664 145.415,192.975 v1(145.415,191.033) ; U4.22@155.687,150.754 154.198,150.754 153.198,151.754 ; v1(159.04,159.69) 159.04,159.865 158.215,160.69 154.736,160.69 154.711,160.665 154.586,160.665 153.811,159.89 v1(153.811,159.715) 152.883,159.715 151.737,158.57 U4.12@151.737,155.204 151.737,153.215 153.198,151.754 ; C11.1@160.463,151.107 C11.1@160.539,151.107 ; C11.1@160.528,151.369 160.528,152.256 160.257,152.527 158.308,152.527 157.536,151.754 U4.20@155.687,151.754 153.198,151.754 ; C11.1@160.539,151.184 C11.1@160.539,151.359 ; C11.1@160.63,151.293 C11.1@160.641,151.282
  Bottom Layer w0.35: J5.2@141.58,192.024 141.705,192.149 142.619,192.149 143.809,193.339 144.226,193.339 v1(144.551,193.664)
  other v1: 151.587,150.546 148.285,150.597 148.285,152.146 143.866,161.874 166.016,173.163 171.096,173.163 176.176,173.163 151.751,176.428 163.476,176.463 168.556,176.463 173.636,176.463 156.602,176.505 155.856,183.323 160.936,183.323 166.016,183.323 171.096,183.323 176.176,183.323 163.476,186.623 168.556,186.623 173.636,186.623 141.453,194.869
BOOT0: J3.02 U4.60 | length 12.2
  Bottom Layer w0.3: 142.563,151.714 143.003,151.714 143.413,151.304 143.549,151.304 143.599,151.254 U4.60@144.287,151.254
  Bottom Layer w0.35: J3.02@133.426,154.457 135.585,154.457 138.328,151.714 142.563,151.714
BOOT1: J4.02 U4.28 | length 33.3
  Bottom Layer w0.3: U4.28@155.687,147.777 156.935,147.777 157.462,148.304 163.146,148.304 170.438,155.596 179.284,155.596 183.22,159.531 183.22,159.622 183.566,159.968 J4.02@183.566,160.299
BUTTON: C27.1 R10.1 SW2.3 SW2.4 U4.58 | length 38.4
  Bottom Layer w0.3: 141.248,150.495 142.352,150.495 142.542,150.304 143.549,150.304 143.599,150.254 U4.58@144.287,150.254
  Bottom Layer w0.35: R10.1@121.448,158.267 121.474,158.242 121.474,156.185 C27.1@121.499,156.159 124.065,153.594 128.162,153.594 SW2.3@129.87,155.302 SW2.4@129.87,146.202 129.87,146.042 130.395,145.517 135.484,145.517 139.186,149.219 139.186,149.422 140.259,150.495 141.248,150.495
CS1: J8.02 U4.33 | length 41.2
  Bottom Layer w0.3: U4.33@153.737,143.804 154.417,143.804 154.813,143.408 162.738,143.408 166.751,147.422 166.751,150.636 170.62,154.505 185.449,154.505 J8.02@187.452,152.502
CS2: J8.01 U4.29 | length 35
  Bottom Layer w0.3: U4.29@155.687,147.254 157.048,147.254 157.648,147.854 163.333,147.854 170.52,155.042 J8.01@187.452,155.042
fM: B1.4 J12.04 U4.23 | length 84.9
  Top Layer w0.3: 146.511,162.247 147.037,161.722 150.19,161.722 151.428,160.484 151.428,158.672 152.087,158.014 154.152,158.014 156.312,155.854 162.077,155.854 163.17,156.947 v1(164.846,156.947)
  Top Layer w0.35: 146.511,162.247 144.915,163.843 144.915,169.375 146.914,171.374 156.667,171.374 158.396,173.102 v1(158.396,176.463)
  Bottom Layer w0.35: J12.04@139.217,178.867 141.376,178.867 145.118,175.125 157.057,175.125 v1(158.396,176.463) ; U4.23@155.687,150.254 162.257,150.254 165.628,153.625 165.628,156.165 v1(164.846,156.947)
GND: C1.1 C2.1 C3.1 C4.1 C5.1 C6.1 C7.1 C8.1 C9.1 C10.1 C14.2 C15.2 C16.2 C17.2 C18.2 C19.1 C20.2 C23.2 C27.2 J2.1 J3.03 J4.03 J6.03 J7.03 J8.06 J9.06 J10.04 J11.05 J12.02 P1_MD1.9 P1_MD2.9 R1.2 R2.2 R3.1 R12_MD1.1 R12_MD2.1 R13_MD1.1 R13_MD2.1 R14_MD1.1 R14_MD2.1 SW1.1 SW1.2 SW2.1 SW2.2 U1.1 U2.4 U2.5 U2.6 U2.7 U2.9 U4.18 U4.31 U4.47 U4.63 | length 81.9
  Top Layer w0.3: U2.9@163.185,179.75 U2.7@161.99,179.75 160.508,179.75 160.008,180.25 ; U2.9@163.197,180.136 U2.9@163.083,180.25 ; U2.9@163.208,180.227 163.185,180.25 U2.9@163.083,180.25 ; U2.9@163.233,180.173 U2.9@163.406,180 ; U2.9@163.537,180 164.287,180.75 U2.4@164.88,180.75 ; 160.008,180.25 v1(159.512,180.746) 159.514,180.748 161.989,180.748 U2.5@161.99,180.75 162.583,180.75 U2.9@163.083,180.25 ; 160.008,180.25 U2.6@161.99,180.25 U2.9@163.083,180.25
  Top Layer w0.35: U2.9@163.185,179.75 v1(163.435,180) U2.9@163.537,180
  Bottom Layer w0.3: C18.2@140.375,153.899 141.519,152.754 U4.63@144.287,152.754 ; C17.2@145.17,141.814 145.471,142.023 146.247,142.56 146.511,142.754 146.687,142.93 146.737,143.204 U4.47@146.737,143.804 ; U4.31@155.687,146.254 157.321,146.254 157.585,146.518 v1(158.648,146.518) C16.2@158.829,146.518 ; U4.18@155.687,152.754 157.199,152.754 157.556,153.111 157.556,154.153 158.369,154.965 159.599,154.965 v1(160.818,153.746)
  Bottom Layer w0.35: v1(118.157,142.563) v1(118.157,151.663) 118.157,152.013 119.385,153.241 119.385,153.599 v1(119.71,153.924) ; C8.1@119.267,170.434 v1(119.318,170.485) ; J2.1@121.234,190.141 122.61,191.516 123.458,191.516 ; v1(127.178,195.061) 127.003,195.061 123.458,191.516 ; v2(128.113,179.324) 130.371,179.324 130.759,178.936 v1(130.759,176.668) ; v1(128.611,184.912) 128.606,184.917 128.606,187.142 v1(128.6,187.147) 128.638,187.185 128.638,189.471 v1(128.676,189.509) 128.676,189.684 126.845,191.516 123.458,191.516 ; v1(140.349,153.848) 140.349,155.048 140.319,155.078 140.319,155.529 C14.2@139.994,155.854 140.319,156.179 140.319,156.702 143.038,159.421 v1(145.567,159.421) 145.602,159.456 146.767,159.456 147.411,160.099 v1(147.411,160.274) ; C17.2@145.035,141.971 v1(145.121,141.884) ; v1(160.818,153.746) 160.831,153.759 160.831,156.654 R1.2@160.844,156.667
  other v1: 160.68,144.693 125.32,146.202 125.32,155.302 119.699,156.159 160.844,156.845 119.863,162.41 121.844,162.574 119.866,167.97 154.189,173.076 119.355,178.04 130.926,201.397 159.871,201.397 130.926,205.207 159.871,205.816 130.85,208.382 159.998,209.855
ICG: B1.3 J12.05 U4.15 | length 51.6
  Top Layer w0.3: 146.736,161.315 146.779,161.272 149.929,161.272 150.825,160.376 150.825,158.241 152.044,157.023 v1(153.67,157.023)
  Top Layer w0.35: J12.05@139.274,181.463 141.275,179.463 v1(141.275,170.942) ; v1(144.729,171.247) 145.356,171.874 146.706,171.874 ; 146.736,161.315 144.399,163.652 144.399,169.566 146.706,171.874 ; B1.3@155.856,173.163 155.856,172.723 155.006,171.874 146.706,171.874
  Bottom Layer w0.3: U4.15@153.237,155.204 153.237,156.509 153.67,156.942 v1(153.67,157.023)
  Bottom Layer w0.35: v1(141.275,170.942) 144.357,170.942 144.662,171.247 v1(144.729,171.247)
LED: R11.1 U4.59 | length 10.4
  Bottom Layer w0.3: 138.249,151.028 142.455,151.028 142.729,150.754 U4.59@144.287,150.754
  Bottom Layer w0.35: R11.1@135.103,148.917 R11.1@135.103,148.742 136.427,150.067 137.288,150.067 138.249,151.028
MISO: J8.04 U4.35 | length 45.7
  Bottom Layer w0.3: U4.35@152.737,143.804 152.737,142.871 152.837,142.771 152.837,142.744 153.276,142.304 163.183,142.304 167.716,146.837 167.716,150.012 171.309,153.605 180.532,153.605 185.014,149.123 185.014,147.956 185.548,147.422 J8.04@187.452,147.422
MOSI: J8.05 U4.36 | length 47.7
  Bottom Layer w0.3: U4.36@152.236,144.161 152.236,142.735 152.387,142.585 152.387,142.557 153.09,141.854 163.419,141.854 168.199,146.634 168.199,149.835 171.519,153.155 180.322,153.155 184.48,148.996 184.48,147.853 J8.05@187.452,144.882
NetB1_21: B1.21 R6.1 | length 21.2
  Top Layer w0.35: v1(139.805,188.849) 147.93,188.849 149.38,187.398 152.981,187.398 153.316,187.063 B1.21@153.316,186.623
  Bottom Layer w0.35: v1(139.805,188.849) 140.551,188.103 144.641,188.103 145.466,188.928 R6.1@145.466,189.103
NetC6_2: C6.2 D1.1 R3.2 R4.2 U3.1 | length 14.5
  Bottom Layer w0.35: C6.2@119.363,164.685 119.673,164.374 R3.2@121.844,164.374 ; R4.2@121.829,166.014 121.829,164.389 R3.2@121.844,164.374 ; D1.1@126.467,159.917 125.984,159.917 124.079,161.822 U3.1@124.079,165.646 123.799,165.646 123.644,165.491 123.644,164.996 122.839,164.191 122.027,164.191 R3.2@121.844,164.374
NetC19_2: C19.2 U4.30 | length 5.6
  Bottom Layer w0.3: U4.30@155.687,146.754 157.185,146.754 157.835,147.404 159.594,147.404 160.505,146.493 C19.2@160.68,146.493
NetD1_C: D1.C R11.2 | length 2
  Bottom Layer w0.35: R11.2@133.303,148.742 133.328,148.717 133.328,146.812 D1.C@133.353,146.787
NetJ5_1: J5.1 J5.4 R5.2 | length 8.4
  Bottom Layer w0.35: R5.2@134.763,192.847 137.007,192.847 138.78,191.074 J5.4@138.925,191.074 ; J5.4@139.09,191.074 139.4,191.074 140.324,191.998 140.324,192.394 140.779,192.849 141.455,192.849 J5.1@141.58,192.974
NetJ5_3: J5.3 R6.2 R7.1 | length 4
  Bottom Layer w0.35: J5.3@141.58,191.074 143.574,191.074 R7.1@143.615,191.033 143.64,191.008 143.64,189.128 R6.2@143.666,189.103
NetJ13_MD1_01: J13_MD1.01 P1_MD1.14 | length 3.9
  Bottom Layer w0.35: P1_MD1.14@153.285,204.928 157.049,204.928 J13_MD1.01@157.15,205.029
NetJ13_MD1_02: J13_MD1.02 P1_MD1.13 | length 3.9
  Bottom Layer w0.35: P1_MD1.13@153.285,207.468 153.418,207.518 153.64,207.518 153.802,207.541 157.077,207.541 J13_MD1.02@157.15,207.569
NetJ13_MD1_03: J13_MD1.03 P1_MD1.12 | length 4.4
  Bottom Layer w0.35: P1_MD1.12@153.772,210.008 P1_MD1.12@153.285,210.008 153.386,210.109 J13_MD1.03@157.15,210.109
NetJ13_MD1_04: J13_MD1.04 P1_MD1.11 | length 3.9
  Bottom Layer w0.35: P1_MD1.11@153.285,212.573 J13_MD1.04@157.15,212.573
NetJ13_MD2_01: J13_MD2.01 P1_MD2.14 | length 4
  Bottom Layer w0.35: P1_MD2.14@183.439,205.13 J13_MD2.01@187.401,205.13
NetJ13_MD2_02: J13_MD2.02 P1_MD2.13 | length 4
  Bottom Layer w0.35: P1_MD2.13@183.439,207.67 183.452,207.683 J13_MD2.02@187.401,207.683
NetJ13_MD2_03: J13_MD2.03 P1_MD2.12 | length 4
  Bottom Layer w0.35: P1_MD2.12@183.439,210.21 183.452,210.223 J13_MD2.03@187.401,210.223
NetJ13_MD2_04: J13_MD2.04 P1_MD2.11 | length 4
  Bottom Layer w0.35: P1_MD2.11@183.439,212.75 183.452,212.763 J13_MD2.04@187.401,212.763
NetP1_MD1_1: P1_MD1.1 U4.57 | length 61.8
  Top Layer w0.35: v1(140.513,149.654) 140.513,150.484 137.602,153.395 137.602,160.391 134.417,163.576 134.417,180.035 132.909,181.543 132.909,194.639 136.077,197.807 138.545,197.807 P1_MD1.1@140.585,199.848
  Bottom Layer w0.3: 142.823,149.754 U4.57@144.287,149.754
  Bottom Layer w0.35: v1(140.513,149.654) 140.561,149.702 141.147,149.702 141.199,149.754 142.823,149.754
NetP1_MD1_2: P1_MD1.2 R12_MD1.2 SB1_MD1.1 | length 8.4
  Bottom Layer w0.35: R12_MD1.2@132.726,201.397 132.904,201.219 134.62,201.219 SB1_MD1.1@134.595,201.244 138.177,201.244 139.231,202.298 P1_MD1.2@140.573,202.298
NetP1_MD1_3: P1_MD1.3 R13_MD1.2 SB2_MD1.1 | length 8.3
  Bottom Layer w0.35: R13_MD1.2@132.726,205.207 132.802,205.13 R13_MD1.2@132.876,205.13 ; R13_MD1.2@132.876,205.207 R13_MD1.2@132.876,205.13 ; R13_MD1.2@133.051,204.928 132.876,205.103 R13_MD1.2@132.876,205.13 ; P1_MD1.3@140.585,204.928 135.495,204.928 135.293,205.13 SB2_MD1.1@134.595,205.13 R13_MD1.2@132.876,205.13
NetP1_MD1_4: P1_MD1.4 R14_MD1.2 SB3_MD1.1 | length 8.4
  Bottom Layer w0.254: 134.744,208.489 134.871,208.617
  Bottom Layer w0.35: R14_MD1.2@132.65,208.382 134.544,208.382 SB3_MD1.1@134.569,208.407 ; SB3_MD1.1@134.653,208.369 139.683,208.369 P1_MD1.4@140.585,207.468